# Altium PCB ESP_Temperature_1.0.0.PcbDoc
Units mm, origin at the board's own origin, x right, y up, seen from the top; angles counter-clockwise.
Board outline 21 x 50 mm, 2 copper layers (L1, L4), stack 1.472 mm thick; 26 components, 20 nets, 88 pads, 39 vias.
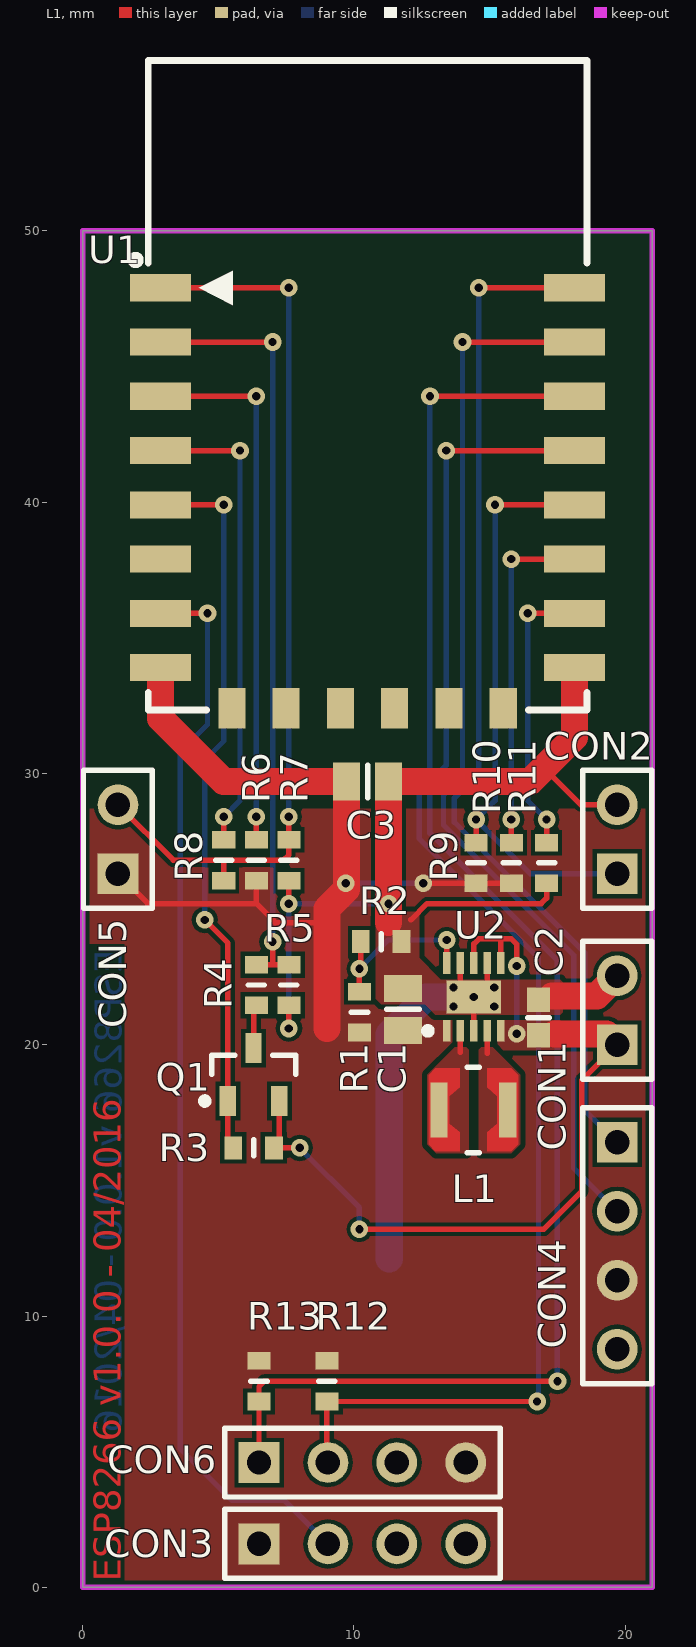
[diagram p0: L1 view]
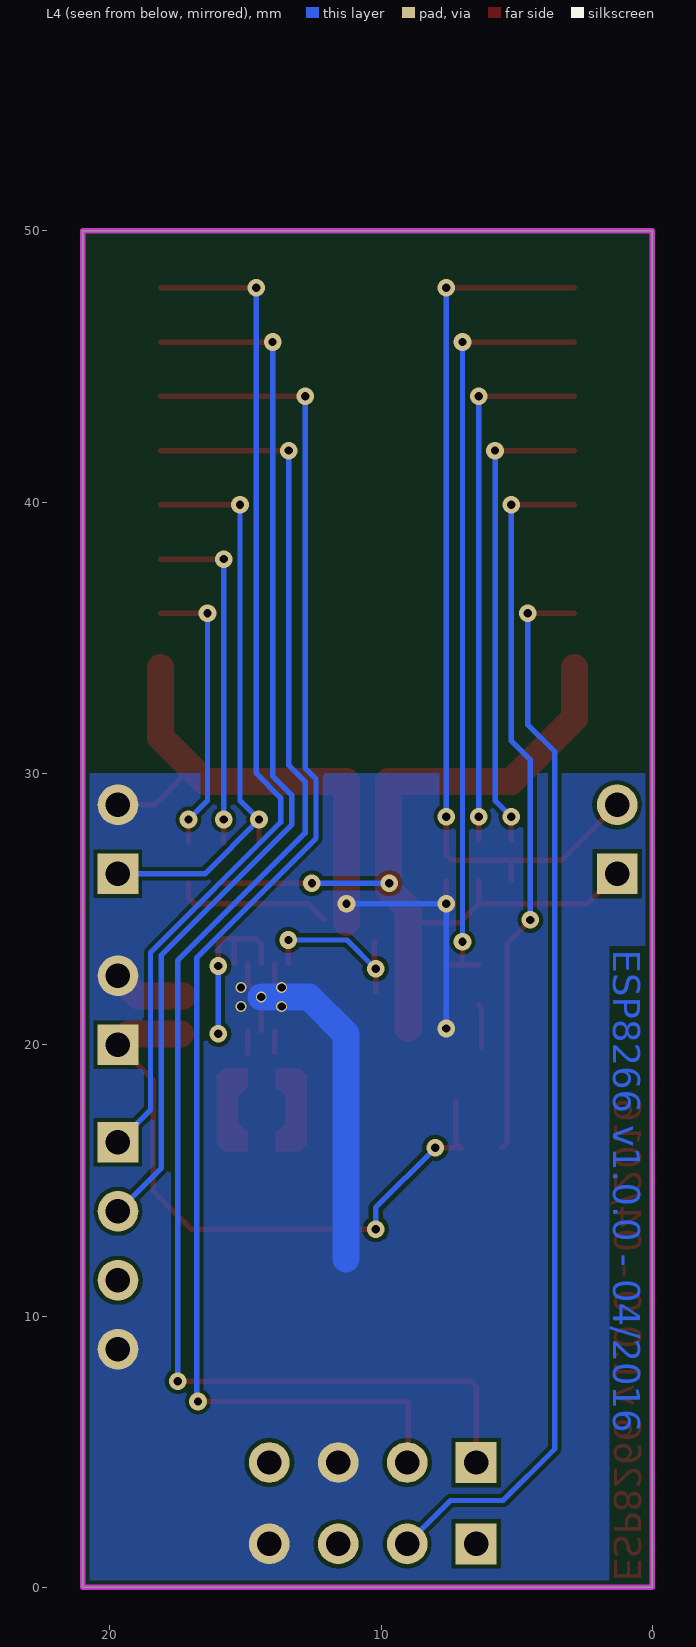
[diagram p1: L4 view, seen from below]
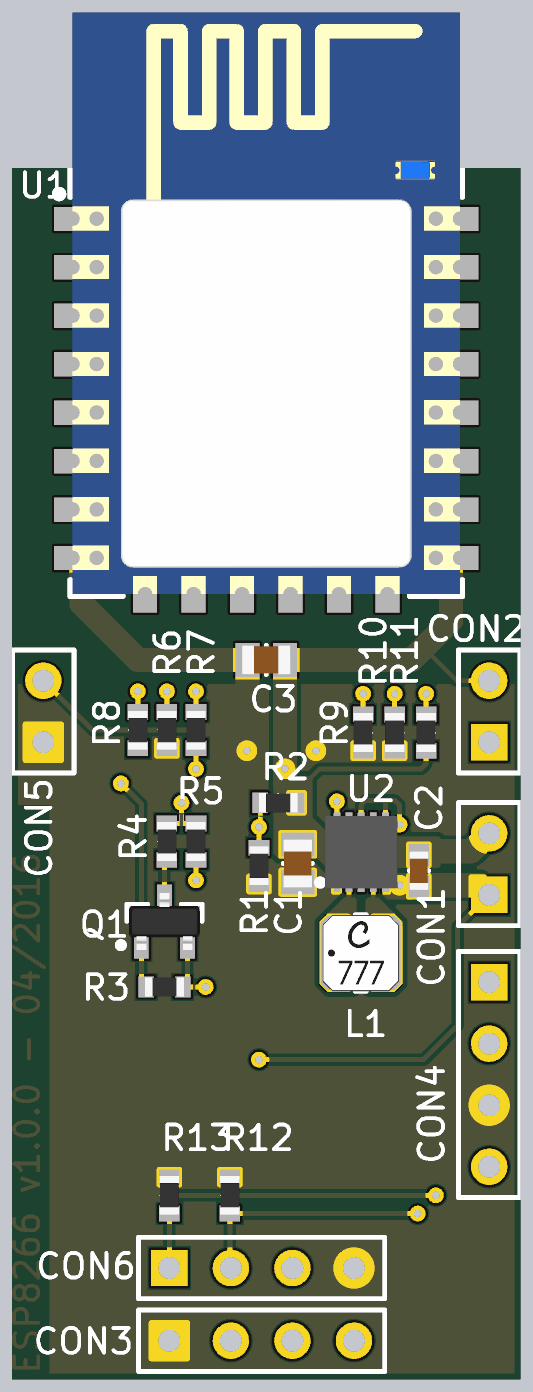
[diagram p2: 3D render of the assembled board from above, using the file's embedded part models]

## Layer stack, top to bottom
Top Solder: solder mask 0.02, Solder Resist, Dk 3.5
L1: signal copper 0.036
Dielectric 1: core 1.4, IS400, Dk 4.2
L4: signal copper 0.036
Bottom Solder: solder mask 0.02, Solder Resist, Dk 3.5

## Board outline
0,0 0,50 21,50 21,0

## Design rules (kind name [scope] priority, off if disabled: settings)
AssemblyTestPointUsage SilkToBoardRegionClearance_1 [All] p2:
AssemblyTestPointUsage SilkToBoardRegionClearance_2 [All] p3:
Clearance [All] p1: gap=0.152 except(0.2: Poly-Poly)
HoleSize [All] p1: absolutevalues=TRUE maxlimit=6.35 minlimit=0.3 maxpercent=80.000 minpercent=20.000
MatchedLengths DiffPair_DIFF100MatchedLengths [InDifferentialPairClass('DIFF100')] p1: tolerance=0.152 checknetsindiffpair=TRUE checkdiffpairvsdiffpair=FALSE checkxsignals=FALSE checkothers=FALSE
MinimumSolderMaskSliver [All] p1: minsoldermaskwidth=0.1
MinimumSolderMaskSliver SilkscreenOverComponentPads_2 [All] p2: minsoldermaskwidth=0.254
MinimumSolderMaskSliver SilkToSolderMaskClearance_1 [IsPad] p3: minsoldermaskwidth=0.254
MinimumSolderMaskSliver SilkscreenOverComponentPads_1 [All] p4: minsoldermaskwidth=0.254
MinimumSolderMaskSliver SilkToSolderMaskClearance [IsPad] p5: minsoldermaskwidth=0.254
MinimumSolderMaskSliver SilkscreenOverComponentPads [All] p6: minsoldermaskwidth=0.254
PolygonConnect [All] p1: connectstyle=Direct reliefconductorwidth=0.254 reliefentries=4 polygonreliefangle="90 Angle" airgapwidth=0.254
RoutingVias [All] p1: holewidth=0.305 width=0.635 viastyle="Through Hole" minholewidth=0.305 minwidth=0.635 maxholewidth=0.711 maxwidth=1.27
SilkToSolderMaskClearance SilkToSolderMaskClearance_2 [IsPad] p1: minsilkscreentomaskgap=0.254 clearancetoexposedcopper=TRUE
SolderMaskExpansion [All] p1: expansion=0.102
Width [All] p1: maxlimit=2.54 minlimit=0.152 preferedwidth=0.254
27 further rules are at their usual default settings.

## Classes and differential pairs
net class "Power Net": NetL1_1 NetL1_2 VCC_3V3 VCC_BAT
differential pair class DIFF90: PCIE_CRX PCIE_CTX PCIE_RX PCIE_TX USB_HOST_D USB_OTG_D
differential pair class DIFF100: CH1_TRX0 CH1_TRX1 CH1_TRX2 CH1_TRX3 CH2_TRX0 CH2_TRX1 CH2_TRX2 CH2_TRX3 CLK1 DRAM_SDCKL0 DRAM_SDCKL1 DRAM_SDQS0 DRAM_SDQS1 DRAM_SDQS2 DRAM_SDQS3 DRAM_SDQS4 DRAM_SDQS5 DRAM_SDQS6 DRAM_SDQS7 HDMI_CLK HDMI_D0 HDMI_D1 HDMI_D2 HDMI_OUT_CLK HDMI_OUT_D0 HDMI_OUT_D1 HDMI_OUT_D2 PCIE_REFCLK

## Components (designator, comment, footprint, x,y, rotation, side; value= is the part's Value field where it differs from the comment)
C1 "10u/10V" C-0805 11.8,21.3 r270 top
C2 "2.2uF/16V/X5R" C-0603 16.8,21 r270 top
C3 "10u/10V" C-0805 10.5,29.7 r180 top
CON1 "PAD1G02" HDR1X02S 19.7,20 r90 top
CON2 "PAD1G02" HDR1X02S 19.7,26.3 r90 top
CON3 "PAD1G04" HDR1X04S 6.5,1.6 r0 top
CON4 "PAD1G04" HDR1X04S 19.7,16.4 r270 top
CON5 "PAD1G02" HDR1X02S 1.3,26.3 r90 top
CON6 "PAD1G04" HDR1X04S 6.5,4.6 r0 top
L1 "LPS3015-152MRC" LPS3015 14.4,17.6 r0 top
Q1 "FDV304P" SOT23-3L 6.3,18.9 r90 top
R1 "887k 1%" R-0603 10.2,21.2 r270 top
R2 "100k 1%" R-0603 11,23.8 r180 top
R3 "100k 1%" R-0603 6.3,16.2 r0 top
R4 "887k 1%" R-0603 6.4,22.2 r270 top
R5 "100k 1%" R-0603 7.6,22.2 r90 top
R6 "10k" R-0603 6.4,26.8 r270 top
R7 "10k" R-0603 7.6,26.8 r90 top
R8 "470R" R-0603 5.2,26.8 r90 top
R9 "10k" R-0603 14.5,26.7 r90 top
R10 "10k" R-0603 15.8,26.7 r90 top
R11 "10k" R-0603 17.1,26.7 r90 top
R12 "2.2k" R-0603 9,7.6 r90 top
R13 "2.2k" R-0603 6.5,7.6 r90 top
U1 "ESP_12_E" ESP_12_E 2.5,47.9 r0 top locked
U2 "TPS63030DSK" DSK10-2000X1200TP_V 14.416,21.76 r90 top

## Footprints (in the part's own frame and the unit in brackets; to place one, negate y for a bottom-side part, rotate by r counter-clockwise, add the part's x,y. Pads: shape width x height; smd on the part's side, far side on the other; paste and mask are expansions set on the pad)
C-0603 [mm]
  rect 0.9x0.85 smd: 1(-0.65,0) 2(0.65,0)
  silkscreen extent 0,-0.4 0,0.4, body extent -0.8,-0.4 0.8,0.4, height 0.8
C-0805 [mm]
  rect 1x1.4 smd: 1(-0.775,0) 2(0.775,0)
  silkscreen extent 0,-0.6 0,0.6, body extent -1,-0.6 1,0.6, height 1.2
DSK10-2000X1200TP_V [mm] "SON, 10-Leads, Body 2.5x2.5mm, Pitch 0.5mm, Thermal Pad 2x1.2 mm"
  rect 0.8x0.28 smd: 1(-1.25,1) 2(-1.25,0.5) 3(-1.25,0) 4(-1.25,-0.5) 5(-1.25,-1) 6(1.25,-1) 7(1.25,-0.5) 8(1.25,0) 9(1.25,0.5) 10(1.25,1)
  rect 1.2x2 smd paste-2: 11(0,0)
  silkscreen extent -1.38,1.57 -1.12,1.82, body extent -1.5,-1.5 1.5,1.5, height 0.9
ESP_12_E [mm] "ESP-12 Wi-Fi Module by AI-Thinker"
  rect 2.25x1 smd: 1(0.375,0) 2(0.375,-2) 3(0.375,-4) 4(0.375,-6) 5(0.375,-8) 6(0.375,-10) 7(0.375,-12) 8(0.375,-14) 15(15.625,-14) 16(15.625,-12) 17(15.625,-10) 18(15.625,-8) 19(15.625,-6) 20(15.625,-4) 21(15.625,-2) 22(15.625,0)
  rect 1x1.5 smd: 9(3,-15.5) 10(5,-15.5) 11(7,-15.5) 12(9,-15.5) 13(11,-15.5) 14(13,-15.5)
  silkscreen extent -0.7,-15.57 16.08,8.37, body extent 0,-15.49 16,8.51, height 2.75
HDR1X02S [mm] "Connector; Header; 2 Position"
  rect 1.5x1.5 hole 0.9: 1(0,0)
  round 1.5 hole 0.9: 2(2.54,0)
  silkscreen extent -1.27,-1.27 3.81,1.27
HDR1X04S [mm] "Connector; Header; 4 Position"
  rect 1.5x1.5 hole 0.9: 1(0,0)
  round 1.5 hole 0.9: 2(2.54,0) 3(5.08,0) 4(7.62,0)
  silkscreen extent -1.27,-1.27 8.89,1.27
LPS3015 [mil]
  rect 25x80 smd: 1(-50,0) 2(50,0)
  L1 region: 65,-50 55,-60 20,-60 20,-32.5 35,-20 35,20 20,32.5 20,60 55,60 65,50
  L1 region: -65,-50 -55,-60 -20,-60 -20,-32.5 -35,-20 -35,20 -20,32.5 -20,60 -55,60 -65,50
  silkscreen extent -9,-62 9,62, body extent -62,-62 62,62, height 59
R-0603 [mm]
  rect 0.65x0.85 smd: 1(-0.75,0) 2(0.75,0)
  silkscreen extent 0,-0.3 0,0.3, body extent -0.8,-0.4 0.8,0.4, height 0.4
SOT23-3L [mm] "SOT23, 3-Leads, Body 2,90x2,48mm, Pitch 0,95mm, IPC High Density"
  rect 1.1x0.6 smd: 1(-0.975,0.95) 2(-0.975,-0.95) 3(0.975,0)
  silkscreen extent -1.1,-1.55 0.71,1.92, body extent -1.17,-1.46 1.17,1.46, height 1

## Part data
C1 C3: library part CMP-00295-1, "SMD Ceramic Capacitor 0805 10u/10V"
C2: library part CMP-00265-1, "SMD Ceramic Capacitor 0603 2.2uF/16V/X5R"
CON1 CON2 CON5: library part CMP-00005-1, "1x2pin single row pads, 2.54mm"
CON3 CON4 CON6: library part CMP-00006-3, "1x4pin single row pads, 2.54mm"
L1: library part CMP-00325-2, "Shielded inductor 1.5uH/1.3A 3x3mm"
Q1: library part CMP-00186-2, "P-Channel Digital FET 25V, 460mA"
R1 R4: library part CMP-00324-1, "SMD Resistor 0603 887k 1%"
R2 R3 R5: library part CMP-00033-2, "SMD Resistor 0603 100k 1%"
R6 R7 R9 R10 R11: library part CMP-00036-2, "SMD Resistor 0603 10k"
R8: library part CMP-00095-2, "SMD Resistor 0603 470R"
R12 R13: library part CMP-00080-2, "SMD Resistor 0603 2k2"
U1: "ESP-12 Wi-Fi Module by AI-Thinker"
U2: library part CMP-00323-3, "High Efficient Single Inductor Buck-Boost Converter with 1-A Switches"

## Via types
v1: diameter 0.65, hole 0.305, L1 to L4, 34 vias
v2: diameter 0.4, hole 0.305, L1 to L4, 5 vias

## Nets (pads, with @x,y where several pads share a name; then routed paths per layer and width w, separated by ;. In a path a pad name is that pad's centre, name@x,y a point inside that pad or via, vN(x,y) a via of type N, cw(c..) or ccw(c..) an arc to the next point about the centre after c; other vN are vias at no path point)
ADC: R4.1 R5.2 U1.2 | length 28.3
  L1 w0.2: U1.2 v1(7,45.9) ; R4.1 7,22.95 ; v1(7,23.8) 7,22.95 ; R5.2 7,22.95
  L4 w0.2: v1(7,23.8) v1(7,45.9)
GND: C1.1 C2.1 C3.1 CON1.2 CON2.2 CON3.4 CON4.4 CON6.3 R2.1 R5.1 R7.1 R11.1 U1.15 U2.3 U2.7 U2.9 U2.11 | length 53.3
  L1 w0.2: v1(7.6,20.6) R5.1 ; v1(7.6,25.2) R7.1 ; 12.1,24.6 12.7,25.2 16.9,25.2 17.1,25.4 R11.1 ; U2.9 13.916,22.26 v2(14.416,21.76) ; U2.3 v2(14.416,21.76) ; U2.7 14.916,22.26 v2(14.416,21.76) ; 17,30.2 18.36,28.84 CON2.2
  L1 w1: 11.275,24.5 C3.1 16.5,29.7 17,30.2 18.125,31.325 U1.15 ; 17.3,21.8 18.96,21.8 CON1.2
  L4 w0.2: v1(7.6,20.6) v1(7.6,25.2) v1(11.275,25.2)
  L4 w1: 11.3,12.1 11.3,20.4 12.66,21.76 v2(14.416,21.76)
  other v2: 13.666,21.41 15.166,21.41 13.666,22.11 15.166,22.11
GPIO0: CON2.1 R9.2 U1.18 | length 21.7
  L1 w0.2: R9.2 v1(14.5,28.3) ; v1(15.2,39.9) U1.18
  L4 w0.2: v1(15.2,39.9) 15.2,29 v1(14.5,28.3) 16.5,26.3 CON2.1
GPIO2: R10.2 U1.17 | length 12.8
  L1 w0.2: R10.2 v1(15.8,28.3) ; v1(15.8,37.9) U1.17
  L4 w0.2: v1(15.8,28.3) v1(15.8,37.9)
GPIO15: R11.2 U1.16 | length 10.5
  L1 w0.2: v1(16.4,35.9) U1.16 ; R11.2 v1(17.1,28.3)
  L4 w0.2: v1(16.4,35.9) 16.4,29 v1(17.1,28.3)
MEAS_EN: Q1.1 R3.1 U1.5 | length 26.7
  L1 w0.2: U1.5 v1(5.2,39.9) ; v1(4.5,24.6) 5.35,23.75 Q1.1 5.35,16.4 R3.1
  L4 w0.2: v1(4.5,24.6) 4.5,30.5 5.2,31.2 v1(5.2,39.9)
NetL1_1: L1.1 U2.2 | length 0.8
  L1 w0.2: 13.916,19.716 U2.2
NetL1_2: L1.2 U2.4 | length 0.8
  L1 w0.2: 14.916,19.684 U2.4
NetQ1_3: Q1.3 R4.2 | length 1.6
  L1 w0.2: Q1.3 6.3,21.35 R4.2
NetR1_1: R1.1 R2.2 U2.10 | length 6.4
  L1 w0.2: R1.1 v1(10.2,22.8) 10.25,22.85 R2.2 ; U2.10 v1(13.416,23.86)
  L4 w0.2: v1(10.2,22.8) 11.26,23.86 v1(13.416,23.86)
NetR6_1: R6.1 U1.3 | length 19.9
  L1 w0.2: U1.3 v1(6.4,43.9) ; R6.1 v1(6.4,28.4)
  L4 w0.2: v1(6.4,28.4) v1(6.4,43.9)
NetR8_2: R8.2 U1.4 | length 17.5
  L1 w0.2: U1.4 v1(5.8,41.9) ; R8.2 v1(5.2,28.4)
  L4 w0.2: v1(5.2,28.4) 5.8,29 v1(5.8,41.9)
RST: CON5.2 R7.2 R8.1 U1.1 | length 33.6
  L1 w0.2: CON5.2 3.34,26.8 5.2,26.8 ; U1.1 v1(7.6,47.9) ; R8.1 5.2,26.8 ; v1(7.6,28.4) R7.2 7.6,27 7.4,26.8 5.2,26.8
  L4 w0.2: v1(7.6,28.4) v1(7.6,47.9)
RXD: CON4.2 U1.21 | length 39.1
  L1 w0.2: v1(14,45.9) U1.21
  L4 w0.2: v1(14,45.9) 14,29.898 13.3,29.198 13.3,28.1 18.1,23.3 18.1,15.46 CON4.2
SCL: CON6.2 R12.1 U1.20 | length 54.4
  L1 w0.2: CON6.2 9,4.64 R12.1 v1(16.75,6.85) ; v1(12.8,43.9) U1.20
  L4 w0.2: v1(12.8,43.9) 12.8,30.198 12.4,29.798 12.4,27.6 16.8,23.2 16.8,6.9 v1(16.75,6.85)
SDA: CON6.1 R13.1 U1.19 | length 55.1
  L1 w0.2: CON6.1 R13.1 6.5,7.4 6.7,7.6 v1(17.5,7.6) ; v1(13.4,41.9) U1.19
  L4 w0.2: v1(13.4,41.9) 13.4,30.3 12.8,29.7 12.8,27.8 17.5,23.1 v1(17.5,7.6)
TEMP_HUM: CON3.2 U1.7 | length 39.8
  L1 w0.2: U1.7 v1(4.6,35.9)
  L4 w0.2: v1(4.6,35.9) 4.6,31.8 3.6,30.8 3.6,5.1 5.5,3.2 7.44,3.2 CON3.2
TXD: CON4.1 U1.22 | length 37.9
  L1 w0.2: v1(14.6,47.9) U1.22
  L4 w0.2: v1(14.6,47.9) 14.6,30 13.7,29.1 13.7,28.2 18.5,23.4 18.5,17.6 CON4.1
VCC_3V3: C1.2 C3.2 CON3.1 CON4.3 CON5.1 CON6.4 R1.2 R6.2 R9.1 R10.1 R12.2 R13.2 U1.8 U2.1 | length 34.5
  L1 w0.2: CON5.1 2.4,25.2 6.4,25.2 ; R6.2 6.4,25.2 ; 9,24.5 7.1,24.5 6.4,25.2 ; v1(12.55,25.95) R9.1 R10.1
  L1 w1: U1.8 2.875,32.025 5.2,29.7 C3.2 9.725,25.725 9,25 9,24.5 9,20.6
  L4 w0.2: v1(9.7,25.95) v1(12.55,25.95)
VCC_BAT: C2.2 CON1.1 Q1.2 R3.2 U2.5 U2.6 U2.8 | length 30.5
  L1 w0.2: Q1.2 7.25,16.4 R3.2 v1(8,16.2) ; v1(10.2,13.2) 17,13.2 18.4,14.6 18.4,18.7 CON1.1 ; U2.8 14.416,23.716 14.6,23.9 15.4,23.9 ; U2.6 15.416,23.884 15.4,23.9 ; v1(16,22.9) 16,23.7 15.8,23.9 15.4,23.9
  L1 w1: 17.4,20.4 19.3,20.4 CON1.1
  L4 w0.2: v1(8,16.2) 10.2,14 v1(10.2,13.2) ; v1(16,20.4) v1(16,22.9)
pads on no net: CON3.3 U1.6 U1.9 U1.10 U1.11 U1.12 U1.13 U1.14

## Polygon pours and split planes (outlines as drawn)
NetL1_1 on L1 "L01_NETL1_1_P022" (solid, pour order 22): 13.711,19.9 14.232,19.9 14.232,16.332 14.232,16 13.9,16 13.032,16 12.7,16.332 12.7,18.889
VCC_3V3 on L1 "L01_VCC_3V3_P030" (solid, remove dead copper, pour order 30): 0,28.7 21,28.7 21,0 0,0
VCC_BAT on L1 "L01_VCC_BAT_P024" (solid, pour order 24): 15.3,20.9 17.6,20.9 17.7,20.8 17.7,19.9 17.6,19.8 15.5,19.8 15.3,20
NetL1_2 on L1 "L01_NETL1_2_P020" (solid, pour order 20): 15.121,19.9 14.6,19.9 14.6,16.332 14.6,16 14.932,16 15.8,16 16.132,16.332 16.132,18.889
VCC_3V3 on L1 "L01_VCC_3V3_P016" (solid, pour order 16): 13.5,20.9 13,20.9 12.7,21.2 12.6,21.3 11.7,21.3 8.5,21.3 8.5,19.7 13.2,19.7 13.5,20
GND on L1 "L01_GND_P014" (solid, pour order 14): 17.6,22.4 17.7,22.3 17.7,21.2 17.6,21.1 13.4,21.1 13,21.1 12.6,21.5 11,21.5 10.8,21.7 10.8,24.7 11,24.9 12.3,24.9 12.4,24.8 12.4,23.3 12.4,23.2 13.2,22.4
GND on L4 "L02_GND_P028" (solid, remove dead copper, pour order 28): 0,30 21,30 21,0 0,0

## Keep-outs
Keep-Out Layer:
  the board outline again, w0.2

## Other copper
L1:
  text "ESP8266 v1.0.0 - 04/2016" at 1.4,0.2 h1 r90
L4:
  text "ESP8266 v1.0.0 - 04/2016" at 1.44,23.5 h1 r90

## Text inside footprints (layer, text, board x,y; h text height)
U1: Mechanical 13 "CUTOUT POLYGON" at 2.627,55.266 h0.25; Mechanical 13 "ANTENNA AREA" at 2.627,55.774 h0.25